# Altium PCB SD171-6.0PCB4.PcbDoc (part 4 of 11)
Units mil, origin at the board's own origin, x right, y up, seen from the top; angles counter-clockwise.
Board outline 5995 x 3921.26 mil, 6 copper layers (Top Layer, GND, Mid-Layer 1, Mid-Layer 2, VCC, Bottom Layer); 477 components, 539 nets, 2143 pads, 1050 vias.
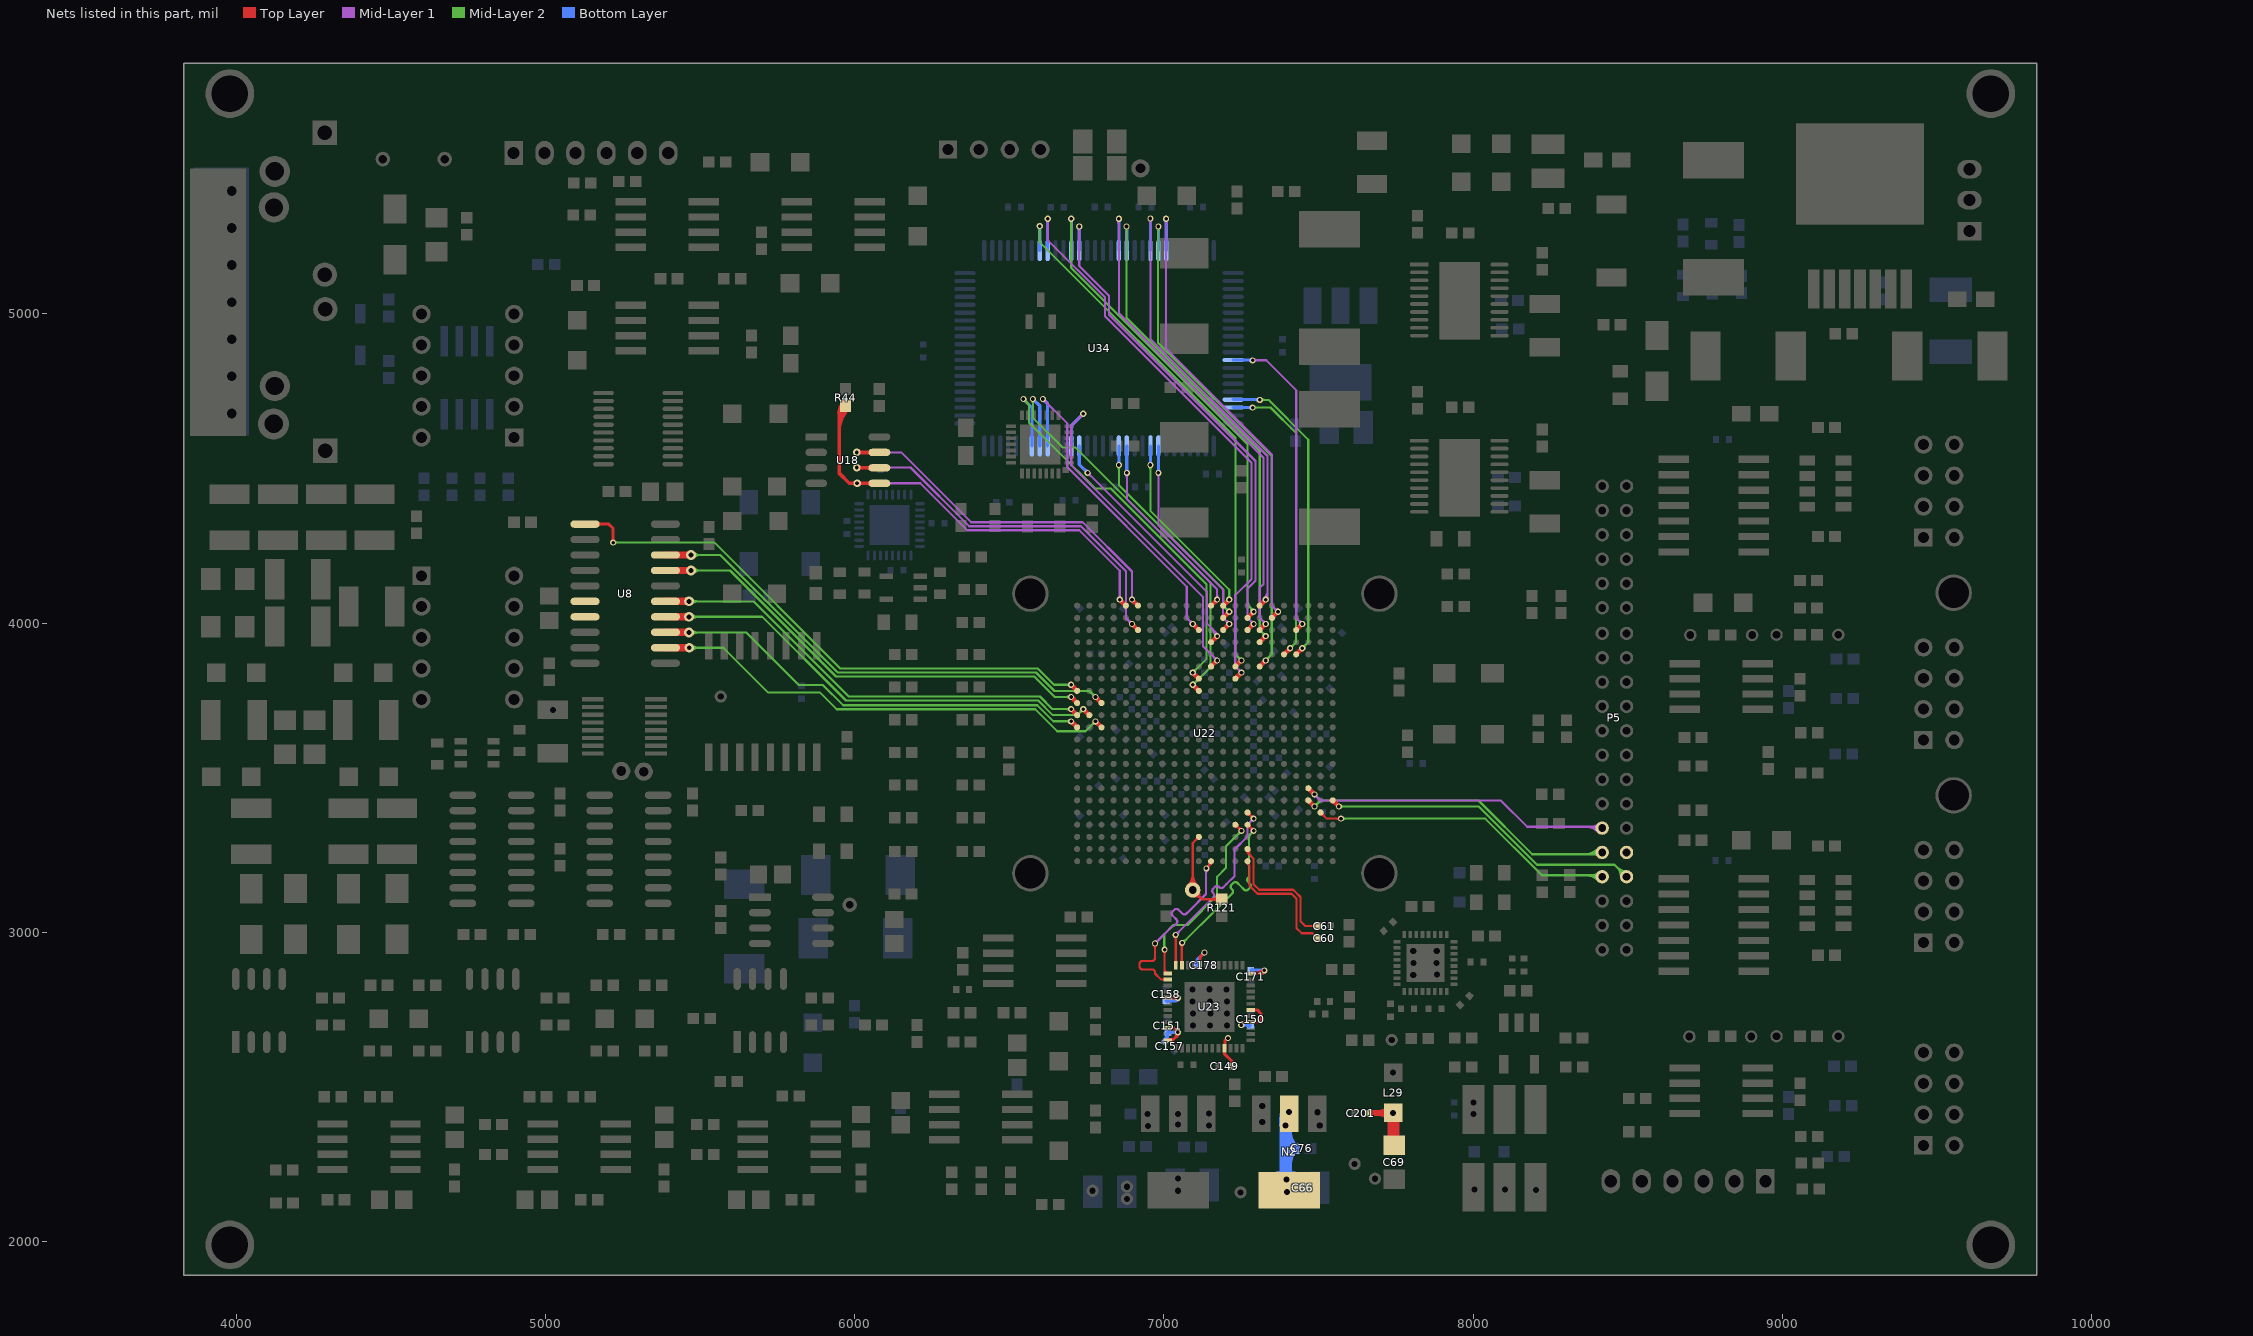
[diagram p8: the nets of this part, all layers, seen from the top]

## Via types
v1: diameter 19.68, hole 11.81, Top Layer to Bottom Layer, 521 vias
v2: diameter 50, hole 25, Top Layer to Bottom Layer, 162 vias
v3: diameter 30, hole 15, Top Layer to Bottom Layer, 100 vias
v4: diameter 39.37, hole 19.68, Top Layer to Bottom Layer, 74 vias
v5: diameter 31.5, hole 15.75, Top Layer to Bottom Layer, 44 vias
v6: diameter 40, hole 20, Top Layer to Bottom Layer, 38 vias
v7: diameter 24, hole 12, Top Layer to Bottom Layer, 33 vias
v8: diameter 47.24, hole 23.62, Top Layer to Bottom Layer, 24 vias
v9: diameter 59.06, hole 31.5, Top Layer to Bottom Layer, 10 vias
v10: diameter 60, hole 30, Top Layer to Bottom Layer, 9 vias
v11: diameter 25.98, hole 12.99, Top Layer to Bottom Layer, tented top, 9 vias
v12: diameter 23.62, hole 11.81, Top Layer to Bottom Layer, 8 vias
v13: diameter 20, hole 12, Top Layer to Bottom Layer, 6 vias
v14: diameter 50, hole 27.56, Top Layer to Bottom Layer, 4 vias
v15: diameter 51.18, hole 27.56, Top Layer to Bottom Layer, 2 vias
v16: diameter 39.37, hole 23.62, Top Layer to Bottom Layer, 2 vias
v17: diameter 80, hole 40, Top Layer to Bottom Layer, 1 vias
v18: diameter 47.24, hole 19.68, Top Layer to Bottom Layer, 1 vias
v19: diameter 47.24, hole 27.56, Top Layer to Bottom Layer, 1 vias
v20: diameter 22.05, hole 11.81, Top Layer to Bottom Layer, 1 vias

## Nets (pads, with @x,y where several pads share a name; then routed paths per layer and width w, separated by ;. In a path a pad name is that pad's centre, name@x,y a point inside that pad or via, vN(x,y) a via of type N, cw(c..) or ccw(c..) an arc to the next point about the centre after c; other vN are vias at no path point) (continued)
D10: U22.H19 U23.11 | length 738.1
  Top Layer w7: v1@7054.52,2960.52 cw(c7046.56,2952.56) 7057.81,2952.56 ; U23.11@7055.83,2902.43 ccw(c7051.05,2907.21) 7057.81,2907.21 ccw(c7064.57,2907.21) U23.11@7059.79,2902.43 ; U23.11@7057.81,2892.6 v1@7057.81,2962.81 ; 7057.81,2946.81 cw(c7077.19,2946.81) v1@7063.48,2960.52 ; U22.H19@7270.41,3341 cw(c7270.41,3325.68) 7281.24,3336.51 cw(c7292.06,3347.34) U22.H19@7276.75,3347.34 ; U22.H19@7270.41,3347.34 v1(7290.1,3327.65) ; v1@7283.75,3327.65 ccw(c7268.44,3327.65) 7279.27,3338.48 ccw(c7290.1,3349.31) v1@7290.1,3333.99
  Mid-Layer 2 w7: v1(7059,2965) 7061,2965 7174,3078 7220.59,3124.59 ccw(c7213.91,3131.27) 7220.59,3137.95 7218.64,3139.9 cw(c7225.32,3146.59) 7218.64,3153.27 7224.36,3159 cw(c7231.05,3152.31) 7237.73,3159 7246.36,3150.36 7259.02,3137.7 ccw(c7265.71,3144.38) 7272.39,3137.7 7278.12,3143.43 ccw(c7271.43,3150.11) 7278.12,3156.79 7272.14,3162.77 cw(c7278.82,3169.45) 7272.14,3176.14 7275,3179 7275,3262 7275,3312.56 v1(7290.1,3327.65) ; v1@7059,2971.34 ccw(c7059,2991.48) 7073.24,2977.24 ; v1@7065.34,2965 cw(c7075.83,2965) 7068.41,2972.41
D11: U22.H18 U23.12 | length 762.2
  Top Layer w7: v1@7033.52,2986.52 cw(c7022.42,2975.42) 7038.11,2975.42 ; U23.12@7036.13,2902.43 ccw(c7031.35,2907.21) 7038.11,2907.21 ccw(c7044.87,2907.21) U23.12@7040.09,2902.43 ; v1(7038,2991) 7037,2990 7037,2987 7038.11,2985.89 U23.12@7038.11,2892.6 ; 7038.11,2975.95 cw(c7053.05,2975.95) v1@7042.48,2986.52 ; U22.H18@7270.41,3380.37 cw(c7270.41,3365.05) 7281.24,3375.88 cw(c7292.06,3386.71) U22.H18@7276.75,3386.71 ; U22.H18@7270.41,3386.71 v1(7290.1,3367.02) ; v1@7283.75,3367.02 ccw(c7268.44,3367.02) 7279.27,3377.85 ccw(c7290.1,3388.68) v1@7290.1,3373.36
  Mid-Layer 1 w7: v1(7038,2991) 7142.08,3095.08 7156.9,3109.9 7159.76,3112.76 ccw(c7153.08,3119.45) 7159.76,3126.13 7159.01,3126.89 cw(c7165.69,3133.57) 7159.01,3140.25 7164.73,3145.98 cw(c7171.42,3139.3) 7178.1,3145.98 7178.86,3145.22 ccw(c7185.54,3151.9) 7192.22,3145.22 7201.5,3154.5 7228,3181 7228,3267.25 7270.75,3310 7270.75,3347.68 v1(7290.1,3367.02) ; v1@7038,2997.34 ccw(c7038,3012.65) 7048.83,3001.83 ccw(c7059.65,2991) v1@7044.34,2991 ; v1@7283.75,3367.02 cw(c7268.44,3367.02) 7279.27,3356.19 cw(c7290.1,3345.37) v1@7290.1,3360.68
D12: U22.J19 U23.13 | length 751.6
  Top Layer w7: v1@6997.52,2938.52 cw(c6986.69,2927.69) 7002,2927.69 cw(c7017.31,2927.69) v1@7006.48,2938.52 ; v1(7002,2943) 7002,2876.71 U23.13@7012.11,2866.6 ; U22.J19@7231.04,3341 cw(c7231.04,3325.68) 7241.87,3336.51 cw(c7252.69,3347.34) U22.J19@7237.38,3347.34 ; U22.J19@7231.04,3347.34 v1(7250.73,3327.65) ; v1@7244.38,3327.65 ccw(c7229.07,3327.65) 7239.9,3338.48 ccw(c7250.73,3349.31) v1@7250.73,3333.99
  Mid-Layer 2 w7: v1@6997.52,2947.48 ccw(c6989.1,2955.9) 7001,2955.9 ; 7001,2960.73 ccw(c7019.73,2960.73) v1@7006.48,2947.48 ; v1(7002,2943) 7002,2940 7001,2939 7001,2993 7031,3023 7076,3023 7172,3119 7172,3179 7201,3208 7201,3277.93 v1(7250.73,3327.65) ; v1@7244.38,3327.65 cw(c7229.07,3327.65) 7239.9,3316.82 cw(c7250.73,3306) v1@7250.73,3321.31
D13: U22.L22 U23.14 | length 744.8
  Top Layer w7: v1@6966.52,2958.52 cw(c6955.69,2947.69) 6971,2947.69 cw(c6986.31,2947.69) v1@6975.48,2958.52 ; v1(6971,2963) 6971,2929 6971,2915.85 cw(c6961.55,2915.85) 6961.55,2906.4 6930.45,2906.4 ccw(c6930.45,2896.95) 6921,2896.95 6921,2888.85 ccw(c6930.45,2888.85) 6930.45,2879.4 6961.55,2879.4 cw(c6961.55,2869.95) 6971,2869.95 6971,2865.9 6990,2846.9 U23.14@7012.11,2846.9 ; U23.14@7002.28,2844.92 ccw(c6997.5,2840.14) 6997.5,2846.9 ccw(c6997.5,2853.66) U23.14@7002.28,2848.88 ; v1(7137,3206) 7152.3,3221.3 U22.L22@7152.3,3229.23 ; v1@7140.96,3209.96 ccw(c7127.37,3223.56) U22.L22@7146.12,3227.82 ; 7149.93,3218.93 ccw(c7141.98,3226.88) U22.L22@7152.94,3229.37
  Mid-Layer 1 w7: v1(6971,2963) 7028,3020 7033,3020 7037.5,3024.5 7040.36,3027.36 ccw(c7033.68,3034.05) 7040.36,3040.73 7027.98,3053.11 cw(c7034.66,3059.79) 7027.98,3066.47 7033.71,3072.2 cw(c7040.39,3065.52) 7047.07,3072.2 7059.46,3059.82 ccw(c7066.14,3066.5) 7072.82,3059.82 7082.5,3069.5 7136,3123 7136,3206 v1(7137,3206) ; v1@6971,2969.34 ccw(c6971,2984.65) 6981.83,2973.83 ccw(c6992.65,2963) v1@6977.34,2963 ; v1@7132.52,3201.52 cw(c7124.1,3193.1) 7136,3193.1 ; 7136,3188.27 cw(c7154.73,3188.27) v1@7141.48,3201.52
DA0: U22.J6 U34.58 | length 1939.4
  Top Layer w15: U22.J6@7231.04,3859.15 v1(7250.73,3878.84)
  Mid-Layer 2 w7: v1(6598,5284) 6598,5232 7231.38,4598.62 7231.38,3898.18 v1(7250.73,3878.84) ; 6598,5268.69 cw(c6613.31,5268.69) 6602.48,5279.52 ccw(c6613.31,5268.69) 6598,5268.69 ; 6598,5268.69 ccw(c6582.69,5268.69) 6593.52,5279.52 cw(c6582.69,5268.69) 6598,5268.69 ; 7239.9,3889.66 cw(c7229.07,3878.84) v1@7244.38,3878.84 ; 7239.9,3889.66 ccw(c7250.73,3900.49) v1@7250.73,3885.18 ; 7239.9,3889.66 cw(c7229.07,3878.84) v1@7244.38,3878.84 ; 7239.9,3889.66 ccw(c7250.73,3900.49) v1@7250.73,3885.18 ; 7239.9,3889.66 ccw(c7250.73,3900.49) v1@7250.73,3885.18 ; 7239.9,3889.66 cw(c7229.07,3878.84) v1@7244.38,3878.84
  Bottom Layer w10: v1(6598,5284) 6598.07,5283.93 U34.58@6598.07,5204.94 ; v1@6594.58,5280.58 cw(c6586.14,5272.14) 6598.07,5272.14 ccw(c6586.14,5272.14) v1@6594.58,5280.58 ; 6598.07,5272.48 cw(c6609.52,5272.48) 6601.42,5280.58 ccw(c6609.52,5272.48) 6598.07,5272.48
DA1: U22.J7 U34.59 | length 2060.1
  Top Layer w15: U22.J7@7231.04,3819.78 v1(7250.73,3839.47)
  Mid-Layer 1 w7: v1(6624,5308) 6624,5238.88 6809,5053.88 6809,4993 7283,4519 7283,4142 7230.7,4089.7 7230.7,3870.13 7230,3869.43 7230,3860.19 v1(7250.73,3839.47) ; 6624,5292.69 cw(c6639.31,5292.69) 6628.48,5303.52 ccw(c6639.31,5292.69) 6624,5292.69 ; 6624,5292.69 ccw(c6608.69,5292.69) 6619.52,5303.52 cw(c6608.69,5292.69) 6624,5292.69 ; 7239.9,3850.29 cw(c7229.07,3839.47) v1@7244.38,3839.47 ; 7239.9,3850.29 ccw(c7250.73,3861.12) v1@7250.73,3845.81 ; 7239.9,3850.29 cw(c7229.07,3839.47) v1@7244.38,3839.47 ; 7239.9,3850.29 ccw(c7250.73,3861.12) v1@7250.73,3845.81 ; 7239.9,3850.29 ccw(c7250.73,3861.12) v1@7250.73,3845.81 ; 7239.9,3850.29 cw(c7229.07,3839.47) v1@7244.38,3839.47
  Bottom Layer w10: U34.59@6623.66,5204.94 6623.66,5307.66 v1(6624,5308) ; v1@6620.58,5304.58 cw(c6613.13,5297.13) 6623.66,5297.13 ccw(c6613.13,5297.13) v1@6620.58,5304.58 ; 6623.66,5295.49 cw(c6636.51,5295.49) 6627.42,5304.58 ccw(c6636.51,5295.49) 6623.66,5295.49
DA2: U22.H2 U34.62 | length 1801.7
  Top Layer w15: U22.H2@7270.41,4016.63 v1(7290.1,4036.32)
  Mid-Layer 2 w7: v1(6700,5308) 6700,5148.38 7270.75,4577.63 7270.75,4067.43 7271,4067.18 7271,4059 7290.1,4039.9 v1(7290.1,4036.32) ; 7281.38,4045.18 ccw(c7294.99,4048.82) v1@7289.86,4035.7 ; 6700,5292.69 cw(c6715.31,5292.69) 6704.48,5303.52 ccw(c6715.31,5292.69) 6700,5292.69 ; 6700,5292.69 ccw(c6684.69,5292.69) 6695.52,5303.52 cw(c6684.69,5292.69) 6700,5292.69 ; 7276.73,4053.27 cw(c7259.78,4036.32) v1@7283.75,4036.32 ; 7276.73,4053.27 cw(c7259.78,4036.32) v1@7283.75,4036.32 ; 7276.73,4053.27 cw(c7259.78,4036.32) v1@7283.75,4036.32
  Bottom Layer w10: v1(6700,5308) 6700.43,5307.57 U34.62@6700.43,5204.94 ; v1@6696.58,5304.58 cw(c6687.26,5295.26) 6700.43,5295.26 ccw(c6687.26,5295.26) v1@6696.58,5304.58 ; 6700.43,5297.35 cw(c6710.65,5297.35) 6703.42,5304.58 ccw(c6710.65,5297.35) 6700.43,5297.35
DA3: U22.H3 U34.63 | length 1803.5
  Top Layer w15: U22.H3@7270.41,3977.26 v1(7290.1,3996.95)
  Mid-Layer 1 w7: v1(6726,5283) 6726,5155.26 6822,5059.26 6822,4998.38 7296,4524.38 7296,4136.62 7270.75,4111.37 7270.75,4016.29 v1(7290.1,3996.95) ; 6726,5267.69 cw(c6741.31,5267.69) 6730.48,5278.52 ccw(c6741.31,5267.69) 6726,5267.69 ; 6726,5267.69 ccw(c6710.69,5267.69) 6721.52,5278.52 cw(c6710.69,5267.69) 6726,5267.69 ; 7279.27,4007.77 cw(c7268.44,3996.95) v1@7283.75,3996.95 ; 7279.27,4007.77 ccw(c7290.1,4018.6) v1@7290.1,4003.29 ; 7279.27,4007.77 cw(c7268.44,3996.95) v1@7283.75,3996.95 ; 7279.27,4007.77 ccw(c7290.1,4018.6) v1@7290.1,4003.29 ; 7279.27,4007.77 ccw(c7290.1,4018.6) v1@7290.1,4003.29 ; 7279.27,4007.77 cw(c7268.44,3996.95) v1@7283.75,3996.95
  Bottom Layer w10: U34.63@6726.02,5204.94 v1(6726,5283) ; v1@6722.58,5279.58 cw(c6714.25,5271.25) 6726.02,5271.25 ccw(c6714.25,5271.25) v1@6722.58,5279.58 ; 6726.02,5271.37 cw(c6737.63,5271.37) 6729.42,5279.58 ccw(c6737.63,5271.37) 6726.02,5271.37
DA4: U22.G3 U34.68 | length 1805.8
  Top Layer w15: U22.G3@7309.78,3977.26 v1(7329.47,3996.95)
  Mid-Layer 1 w7: v1(6854,5308) 6854,5003.15 7322,4535.15 7322,4125.85 7310,4113.85 7310,4016.41 v1(7329.47,3996.95) ; 6854,5292.69 cw(c6869.31,5292.69) 6858.48,5303.52 ccw(c6869.31,5292.69) 6854,5292.69 ; 6854,5292.69 ccw(c6838.69,5292.69) 6849.52,5303.52 cw(c6838.69,5292.69) 6854,5292.69 ; 7318.64,4007.77 cw(c7307.81,3996.95) v1@7323.12,3996.95 ; 7318.64,4007.77 ccw(c7329.47,4018.6) v1@7329.47,4003.29 ; 7318.64,4007.77 cw(c7307.81,3996.95) v1@7323.12,3996.95 ; 7318.64,4007.77 ccw(c7329.47,4018.6) v1@7329.47,4003.29 ; 7318.64,4007.77 ccw(c7329.47,4018.6) v1@7329.47,4003.29 ; 7318.64,4007.77 cw(c7307.81,3996.95) v1@7323.12,3996.95
  Bottom Layer w10: U34.68@6853.98,5204.94 v1(6854,5308) ; v1@6850.58,5304.58 cw(c6842.37,5296.37) 6853.98,5296.37 ccw(c6842.37,5296.37) v1@6850.58,5304.58 ; 6853.98,5296.25 cw(c6865.75,5296.25) 6857.42,5304.58 ccw(c6865.75,5296.25) 6853.98,5296.25
DA5: U22.G4 U34.69 | length 1775.1
  Top Layer w15: U22.G4@7309.78,3937.89 v1(7329.47,3957.58)
  Mid-Layer 2 w7: v1(6879,5283) 6879,4987.77 7310.12,4556.65 7310.12,3977.6 7329.47,3958.26 v1(7329.47,3957.58) ; 6879,5267.69 cw(c6894.31,5267.69) 6883.48,5278.52 ccw(c6894.31,5267.69) 6879,5267.69 ; 6879,5267.69 ccw(c6863.69,5267.69) 6874.52,5278.52 cw(c6863.69,5267.69) 6879,5267.69 ; 7318.15,3969.57 cw(c7306.16,3957.58) v1@7323.12,3957.58 ; 7318.15,3969.57 cw(c7306.16,3957.58) v1@7323.12,3957.58 ; 7318.15,3969.57 cw(c7306.16,3957.58) v1@7323.12,3957.58 ; 7319.81,3967.92 ccw(c7329.47,3977.58) v1@7329.47,3963.92 ; 7319.81,3967.92 ccw(c7329.47,3977.58) v1@7329.47,3963.92 ; 7319.81,3967.92 ccw(c7329.47,3977.58) v1@7329.47,3963.92
  Bottom Layer w10: v1(6879,5283) 6879.57,5282.43 U34.69@6879.57,5204.94 ; v1@6875.58,5279.58 cw(c6865.94,5269.94) 6879.57,5269.94 ccw(c6865.94,5269.94) v1@6875.58,5279.58 ; 6879.57,5272.68 cw(c6889.32,5272.68) 6882.42,5279.58 ccw(c6889.32,5272.68) 6879.57,5272.68
DA6: U22.G1 U34.72 | length 1744.1
  Top Layer w15: U22.G1@7309.78,4056 v1(7329.47,4075.69)
  Mid-Layer 1 w7: v1(6956,5309) 6956,4919.54 7335,4540.54 7335,4081.22 v1(7329.47,4075.69) ; 7332.07,4092.44 ccw(c7340.65,4087.48) v1@7333.83,4080.29 ; 6956,5293.69 cw(c6971.31,5293.69) 6960.48,5304.52 ccw(c6971.31,5293.69) 6956,5293.69 ; 6956,5293.69 ccw(c6940.69,5293.69) 6951.52,5304.52 cw(c6940.69,5293.69) 6956,5293.69 ; v1@7324.98,4080.17 ccw(c7300.79,4104.36) 7335,4104.36 ; v1@7324.98,4080.17 ccw(c7300.79,4104.36) 7335,4104.36 ; v1@7324.98,4080.17 ccw(c7300.79,4104.36) 7335,4104.36 ; v1@7329.93,4075.22 ccw(c7317.69,4087.46) 7335,4087.46 ; v1@7329.93,4075.22 ccw(c7317.69,4087.46) 7335,4087.46 ; v1@7329.93,4075.22 ccw(c7317.69,4087.46) 7335,4087.46
  Bottom Layer w10: v1(6956,5309) 6956.34,5308.66 U34.72@6956.34,5204.94 ; v1@6952.58,5305.58 cw(c6943.49,5296.49) 6956.34,5296.49 ccw(c6943.49,5296.49) v1@6952.58,5305.58 ; 6956.34,5298.13 cw(c6966.87,5298.13) 6959.42,5305.58 ccw(c6966.87,5298.13) 6956.34,5298.13
DA7: U22.G6 U34.73 | length 1825.4
  Top Layer w15: U22.G6@7309.78,3859.15 v1(7329.47,3878.84)
  Mid-Layer 2 w7: v1@6981,5281 6981,4907 7348.81,4539.19 7348.81,3898.86 7329.47,3879.52 v1(7329.47,3878.84) ; v1@7329.47,3885.18 ccw(c7329.47,3898.84) 7339.12,3889.18 ; v1@7329.47,3885.18 ccw(c7329.47,3898.84) 7339.12,3889.18 ; v1@7329.47,3885.18 ccw(c7329.47,3898.84) 7339.12,3889.18 ; v1@7335.81,3878.84 cw(c7352.77,3878.84) 7340.78,3890.83 ; v1@7335.81,3878.84 cw(c7352.77,3878.84) 7340.78,3890.83 ; v1@7335.81,3878.84 cw(c7352.77,3878.84) 7340.78,3890.83 ; v1@6977.52,5278.52 cw(c6969.1,5270.1) 6981,5270.1 ccw(c6969.1,5270.1) v1@6977.52,5278.52 ; 6981,5265.27 cw(c6999.73,5265.27) 6986.48,5278.52 ccw(c6999.73,5265.27) 6981,5265.27
  Bottom Layer w10: U34.73@6981.93,5204.94 6981.93,5282.93 v1(6982,5283) ; v1@6978.58,5279.58 cw(c6970.48,5271.48) 6981.93,5271.48 ccw(c6970.48,5271.48) v1@6978.58,5279.58 ; 6981.93,5271.14 cw(c6993.86,5271.14) 6985.42,5279.58 ccw(c6993.86,5271.14) 6981.93,5271.14
DA8: U22.F2 U34.74 | length 1709.7
  Top Layer w15: U22.F2@7349.15,4016.63 v1(7368.84,4036.32)
  Mid-Layer 1 w7: v1(7007,5308) 7007,4886.92 7349.49,4544.43 7349.49,4055.66 v1(7368.84,4036.32) ; 7007,5292.69 cw(c7022.31,5292.69) 7011.48,5303.52 ccw(c7022.31,5292.69) 7007,5292.69 ; 7007,5292.69 ccw(c6991.69,5292.69) 7002.52,5303.52 cw(c6991.69,5292.69) 7007,5292.69 ; 7358.01,4047.14 cw(c7347.18,4036.32) v1@7362.49,4036.32 ; 7358.01,4047.14 ccw(c7368.84,4057.97) v1@7368.84,4042.66 ; 7358.01,4047.14 cw(c7347.18,4036.32) v1@7362.49,4036.32 ; 7358.01,4047.14 ccw(c7368.84,4057.97) v1@7368.84,4042.66 ; 7358.01,4047.14 ccw(c7368.84,4057.97) v1@7368.84,4042.66 ; 7358.01,4047.14 cw(c7347.18,4036.32) v1@7362.49,4036.32
  Bottom Layer w10: v1(7007,5308) 7007.52,5307.48 U34.74@7007.52,5204.94 ; v1@7003.58,5304.58 cw(c6994.05,5295.05) 7007.52,5295.05 ccw(c6994.05,5295.05) v1@7003.58,5304.58 ; 7007.52,5297.56 cw(c7017.44,5297.56) 7010.42,5304.58 ccw(c7017.44,5297.56) 7007.52,5297.56
DADIN: U8.17
DASCLK: U8.16
DB0: U22.K3 U34.8 | length 898.4
  Top Layer w15: U22.K3@7191.67,3977.26 v1(7211.36,3996.95)
  Mid-Layer 1 w7: v1(6982,4486) 6982,4317 7191.33,4107.67 7191.33,4016.97 v1(7211.36,3996.95) ; v1@6977.52,4481.52 cw(c6966.69,4470.69) 6982,4470.69 ; v1@6977.52,4481.52 cw(c6966.69,4470.69) 6982,4470.69 ; v1@6977.52,4481.52 cw(c6966.69,4470.69) 6982,4470.69 ; 6982,4470.69 cw(c6997.31,4470.69) v1@6986.48,4481.52 ; 6982,4470.69 cw(c6997.31,4470.69) v1@6986.48,4481.52 ; 6982,4470.69 cw(c6997.31,4470.69) v1@6986.48,4481.52 ; 7200.53,4007.77 cw(c7189.7,3996.95) v1@7205.01,3996.95 ; 7200.53,4007.77 ccw(c7211.36,4018.6) v1@7211.36,4003.29 ; 7200.53,4007.77 cw(c7189.7,3996.95) v1@7205.01,3996.95 ; 7200.53,4007.77 ccw(c7211.36,4018.6) v1@7211.36,4003.29 ; 7200.53,4007.77 ccw(c7211.36,4018.6) v1@7211.36,4003.29 ; 7200.53,4007.77 cw(c7189.7,3996.95) v1@7205.01,3996.95
  Bottom Layer w10: U34.8@6981.93,4573.06 6981.93,4486.07 v1(6982,4486) ; v1@6978.58,4489.42 ccw(c6970.48,4497.52) 6981.93,4497.52 ; v1@6978.58,4489.42 ccw(c6970.48,4497.52) 6981.93,4497.52 ; v1@6978.58,4489.42 ccw(c6970.48,4497.52) 6981.93,4497.52 ; 6981.93,4497.86 ccw(c6993.86,4497.86) v1@6985.42,4489.42 ; 6981.93,4497.86 ccw(c6993.86,4497.86) v1@6985.42,4489.42 ; 6981.93,4497.86 ccw(c6993.86,4497.86) v1@6985.42,4489.42
DB1: U22.K1 U34.9 | length 830
  Top Layer w15: U22.K1@7191.67,4056 v1(7211.36,4075.69)
  Mid-Layer 2 w7: v1(6956,4511) 6956,4363 7211,4108 v1@7211,4076.04 ; v1@6951.52,4506.52 cw(c6940.69,4495.69) 6956,4495.69 ; v1@6951.52,4506.52 cw(c6940.69,4495.69) 6956,4495.69 ; v1@6951.52,4506.52 cw(c6940.69,4495.69) 6956,4495.69 ; 6956,4495.69 cw(c6971.31,4495.69) v1@6960.48,4506.52 ; 6956,4495.69 cw(c6971.31,4495.69) v1@6960.48,4506.52 ; 6956,4495.69 cw(c6971.31,4495.69) v1@6960.48,4506.52 ; v1@7206.87,4080.17 ccw(c7196.9,4090.14) 7211,4090.14 ; v1@7206.87,4080.17 ccw(c7196.9,4090.14) 7211,4090.14 ; v1@7206.87,4080.17 ccw(c7196.9,4090.14) 7211,4090.14 ; 7211,4091.86 ccw(c7227.53,4091.86) v1@7215.84,4080.17 ; 7211,4091.86 ccw(c7227.53,4091.86) v1@7215.84,4080.17 ; 7211,4091.86 ccw(c7227.53,4091.86) v1@7215.84,4080.17
  Bottom Layer w10: v1(6956,4511) 6956.34,4511.34 U34.9@6956.34,4573.06 ; v1@6952.58,4514.42 ccw(c6943.49,4523.51) 6956.34,4523.51 ; v1@6952.58,4514.42 ccw(c6943.49,4523.51) 6956.34,4523.51 ; v1@6952.58,4514.42 ccw(c6943.49,4523.51) 6956.34,4523.51 ; 6956.34,4521.87 ccw(c6966.87,4521.87) v1@6959.42,4514.42 ; 6956.34,4521.87 ccw(c6966.87,4521.87) v1@6959.42,4514.42 ; 6956.34,4521.87 ccw(c6966.87,4521.87) v1@6959.42,4514.42
DB2: U22.L1 U34.12 | length 845.7
  Top Layer w15: U22.L1@7152.3,4056 v1(7171.99,4075.69)
  Mid-Layer 1 w7: v1(6880,4486) 6880,4400.62 7171.99,4108.63 v1(7171.99,4075.69) ; v1@6875.52,4481.52 cw(c6864.69,4470.69) 6880,4470.69 ; v1@6875.52,4481.52 cw(c6864.69,4470.69) 6880,4470.69 ; v1@6875.52,4481.52 cw(c6864.69,4470.69) 6880,4470.69 ; 6880,4470.69 cw(c6895.31,4470.69) v1@6884.48,4481.52 ; 6880,4470.69 cw(c6895.31,4470.69) v1@6884.48,4481.52 ; 6880,4470.69 cw(c6895.31,4470.69) v1@6884.48,4481.52 ; v1@7167.5,4080.17 ccw(c7156.67,4091) 7171.99,4091 ; v1@7167.5,4080.17 ccw(c7156.67,4091) 7171.99,4091 ; v1@7167.5,4080.17 ccw(c7156.67,4091) 7171.99,4091 ; 7171.99,4091 ccw(c7187.3,4091) v1@7176.47,4080.17 ; 7171.99,4091 ccw(c7187.3,4091) v1@7176.47,4080.17 ; 7171.99,4091 ccw(c7187.3,4091) v1@7176.47,4080.17
  Bottom Layer w10: U34.12@6879.57,4573.06 6879.57,4486.43 v1(6880,4486) ; v1@6876.58,4489.42 ccw(c6869.35,4496.65) 6879.57,4496.65 ; v1@6876.58,4489.42 ccw(c6869.35,4496.65) 6879.57,4496.65 ; v1@6876.58,4489.42 ccw(c6869.35,4496.65) 6879.57,4496.65 ; 6879.57,4498.74 ccw(c6892.74,4498.74) v1@6883.42,4489.42 ; 6879.57,4498.74 ccw(c6892.74,4498.74) v1@6883.42,4489.42 ; 6879.57,4498.74 ccw(c6892.74,4498.74) v1@6883.42,4489.42
DB3: U22.K2 U34.13 | length 912
  Top Layer w15: U22.K2@7191.67,4016.63 v1(7211.36,4036.32)
  Mid-Layer 2 w7: v1(6854,4511) 6854,4446.62 7192,4108.62 7192,4055.67 v1(7211.36,4036.32) ; v1@6849.52,4506.52 cw(c6838.69,4495.69) 6854,4495.69 ; v1@6849.52,4506.52 cw(c6838.69,4495.69) 6854,4495.69 ; v1@6849.52,4506.52 cw(c6838.69,4495.69) 6854,4495.69 ; 6854,4495.69 cw(c6869.31,4495.69) v1@6858.48,4506.52 ; 6854,4495.69 cw(c6869.31,4495.69) v1@6858.48,4506.52 ; 6854,4495.69 cw(c6869.31,4495.69) v1@6858.48,4506.52 ; 7200.53,4047.14 cw(c7189.7,4036.32) v1@7205.01,4036.32 ; 7200.53,4047.14 ccw(c7211.36,4057.97) v1@7211.36,4042.66 ; 7200.53,4047.14 cw(c7189.7,4036.32) v1@7205.01,4036.32 ; 7200.53,4047.14 ccw(c7211.36,4057.97) v1@7211.36,4042.66 ; 7200.53,4047.14 ccw(c7211.36,4057.97) v1@7211.36,4042.66 ; 7200.53,4047.14 cw(c7189.7,4036.32) v1@7205.01,4036.32
  Bottom Layer w10: v1(6854,4511) U34.13@6853.98,4573.06 ; v1@6850.58,4514.42 ccw(c6842.37,4522.63) 6853.98,4522.63 ; v1@6850.58,4514.42 ccw(c6842.37,4522.63) 6853.98,4522.63 ; v1@6850.58,4514.42 ccw(c6842.37,4522.63) 6853.98,4522.63 ; 6853.98,4522.75 ccw(c6865.75,4522.75) v1@6857.42,4514.42 ; 6853.98,4522.75 ccw(c6865.75,4522.75) v1@6857.42,4514.42 ; 6853.98,4522.75 ccw(c6865.75,4522.75) v1@6857.42,4514.42
DB4: U22.L4 U34.18 | length 1087.2
  Top Layer w15: U22.L4@7152.3,3937.89 v1(7171.99,3957.58)
  Mid-Layer 1 w7: v1(6753,4486) 7139.64,4099.36 7139.64,3997.36 7171.99,3965.01 v1(7171.99,3957.58) ; 7162.72,3968.48 ccw(c7180.76,3973.31) v1@7171.67,3957 ; v1@6753,4479.66 cw(c6753,4464.35) 6763.83,4475.17 ; v1@6753,4479.66 cw(c6753,4464.35) 6763.83,4475.17 ; v1@6753,4479.66 cw(c6753,4464.35) 6763.83,4475.17 ; v1@6759.34,4486 ccw(c6774.65,4486) 6763.83,4475.17 ; v1@6759.34,4486 ccw(c6774.65,4486) 6763.83,4475.17 ; v1@6759.34,4486 ccw(c6774.65,4486) 6763.83,4475.17 ; 7155.9,3981.1 cw(c7132.37,3957.58) v1@7165.64,3957.58 ; 7155.9,3981.1 cw(c7132.37,3957.58) v1@7165.64,3957.58 ; 7155.9,3981.1 cw(c7132.37,3957.58) v1@7165.64,3957.58 ; 7167.85,3969.15 cw(c7156.27,3957.58) v1@7172.64,3957.58 ; 7167.85,3969.15 cw(c7156.27,3957.58) v1@7172.64,3957.58 ; 7167.85,3969.15 cw(c7156.27,3957.58) v1@7172.64,3957.58
  Bottom Layer w10: U34.18@6726.02,4573.06 6726.02,4512.98 v1(6753,4486) ; 6744.73,4494.27 cw(c6736.47,4486) v1@6748.16,4486 ; 6744.73,4494.27 ccw(c6753,4502.53) v1@6753,4490.84 ; 6744.73,4494.27 cw(c6736.47,4486) v1@6748.16,4486 ; 6744.73,4494.27 ccw(c6753,4502.53) v1@6753,4490.84 ; 6744.73,4494.27 ccw(c6753,4502.53) v1@6753,4490.84 ; 6744.73,4494.27 cw(c6736.47,4486) v1@6748.16,4486
DB5: U22.L6 U34.19 | length 1357
  Top Layer w15: U22.L6@7152.3,3859.15 v1(7171.99,3878.84)
  Mid-Layer 1 w7: v1(6739,4677) 6700,4638 6700,4510 7126.64,4083.36 7126.64,3924.18 v1(7171.99,3878.84) ; 6728.17,4666.17 cw(c6739,4655.35) v1@6739,4670.66 ; 6728.17,4666.17 ccw(c6717.35,4677) v1@6732.66,4677 ; 6728.17,4666.17 cw(c6739,4655.35) v1@6739,4670.66 ; 6728.17,4666.17 ccw(c6717.35,4677) v1@6732.66,4677 ; 6728.17,4666.17 ccw(c6717.35,4677) v1@6732.66,4677 ; 6728.17,4666.17 cw(c6739,4655.35) v1@6739,4670.66 ; 7161.16,3889.66 cw(c7150.33,3878.84) v1@7165.64,3878.84 ; 7161.16,3889.66 ccw(c7171.99,3900.49) v1@7171.99,3885.18 ; 7161.16,3889.66 cw(c7150.33,3878.84) v1@7165.64,3878.84 ; 7161.16,3889.66 ccw(c7171.99,3900.49) v1@7171.99,3885.18 ; 7161.16,3889.66 ccw(c7171.99,3900.49) v1@7171.99,3885.18 ; 7161.16,3889.66 cw(c7150.33,3878.84) v1@7165.64,3878.84
  Bottom Layer w10: U34.19@6700.43,4573.06 6700.43,4638.43 v1(6739,4677) ; 6730.73,4668.73 cw(c6739,4660.47) v1@6739,4672.16 ; 6730.73,4668.73 ccw(c6722.47,4677) v1@6734.16,4677 ; 6730.73,4668.73 cw(c6739,4660.47) v1@6739,4672.16 ; 6730.73,4668.73 ccw(c6722.47,4677) v1@6734.16,4677 ; 6730.73,4668.73 ccw(c6722.47,4677) v1@6734.16,4677 ; 6730.73,4668.73 cw(c6739,4660.47) v1@6739,4672.16
DB6: U22.M3 U34.22 | length 1296.5
  Top Layer w15: v1(7093.24,3996.95) U22.M3@7112.93,3977.26
  Mid-Layer 1 w7: v1(6608,4725) 6687,4646 6687,4504.62 7073.9,4117.71 7073.9,4021.9 ; 7074,4022 7073.9,4021.9 ; v1(7093.24,3996.95) 7073.9,4016.29 7073.9,4021.9 ; v1@6608,4718.66 cw(c6608,4703.35) 6618.83,4714.17 ; v1@6608,4718.66 cw(c6608,4703.35) 6618.83,4714.17 ; v1@6608,4718.66 cw(c6608,4703.35) 6618.83,4714.17 ; v1@6614.34,4725 ccw(c6629.65,4725) 6618.83,4714.17 ; v1@6614.34,4725 ccw(c6629.65,4725) 6618.83,4714.17 ; v1@6614.34,4725 ccw(c6629.65,4725) 6618.83,4714.17 ; 7082.42,4007.77 cw(c7071.59,3996.95) v1@7086.9,3996.95 ; 7082.42,4007.77 ccw(c7093.24,4018.6) v1@7093.24,4003.29 ; 7082.42,4007.77 cw(c7071.59,3996.95) v1@7086.9,3996.95 ; 7082.42,4007.77 ccw(c7093.24,4018.6) v1@7093.24,4003.29 ; 7082.42,4007.77 ccw(c7093.24,4018.6) v1@7093.24,4003.29 ; 7082.42,4007.77 cw(c7071.59,3996.95) v1@7086.9,3996.95
  Bottom Layer w10: v1(6608,4725) 6623.66,4709.34 U34.22@6623.66,4573.06 ; 6616.27,4716.73 cw(c6624.53,4725) 6612.84,4725 ccw(c6624.53,4725) 6616.27,4716.73 ; 6616.27,4716.73 ccw(c6608,4708.47) 6608,4720.16 cw(c6608,4708.47) 6616.27,4716.73
DB7: U22.M8 U34.23 | length 1599.5
  Top Layer w15: v1(7093.24,3800.1) U22.M8@7112.93,3780.41
  Mid-Layer 2 w7: v1(6576,4725) 6576,4664 6671.77,4568.23 6713,4568.23 7151,4130.23 7151,3857.85 v1(7093.24,3800.1) ; v1@6571.52,4720.52 cw(c6560.69,4709.69) 6576,4709.69 ; v1@6571.52,4720.52 cw(c6560.69,4709.69) 6576,4709.69 ; v1@6571.52,4720.52 cw(c6560.69,4709.69) 6576,4709.69 ; 6576,4709.69 cw(c6591.31,4709.69) v1@6580.48,4720.52 ; 6576,4709.69 cw(c6591.31,4709.69) v1@6580.48,4720.52 ; 6576,4709.69 cw(c6591.31,4709.69) v1@6580.48,4720.52 ; v1@7093.24,3806.44 ccw(c7093.24,3821.75) 7104.07,3810.92 ; v1@7093.24,3806.44 ccw(c7093.24,3821.75) 7104.07,3810.92 ; v1@7093.24,3806.44 ccw(c7093.24,3821.75) 7104.07,3810.92 ; v1@7099.59,3800.1 cw(c7114.9,3800.1) 7104.07,3810.92 ; v1@7099.59,3800.1 cw(c7114.9,3800.1) 7104.07,3810.92 ; v1@7099.59,3800.1 cw(c7114.9,3800.1) 7104.07,3810.92
  Bottom Layer w10: v1(6576,4725) 6598.07,4702.93 U34.23@6598.07,4573.06 ; v1@6576,4720.16 cw(c6576,4708.47) 6584.27,4716.73 ; v1@6576,4720.16 cw(c6576,4708.47) 6584.27,4716.73 ; v1@6576,4720.16 cw(c6576,4708.47) 6584.27,4716.73 ; v1@6580.84,4725 ccw(c6592.53,4725) 6584.27,4716.73 ; v1@6580.84,4725 ccw(c6592.53,4725) 6584.27,4716.73 ; v1@6580.84,4725 ccw(c6592.53,4725) 6584.27,4716.73
DB8: U22.M7 U34.24 | length 1570.3
  Top Layer w15: v1(7093.24,3839.47) U22.M7@7112.93,3819.78
  Mid-Layer 2 w7: v1(6545,4725) 6563,4707 6563,4648.62 6656.38,4555.23 6776.65,4435 6827.85,4435 7138,4124.85 7138,3884.22 v1(7093.24,3839.47) ; v1@6545,4718.66 cw(c6545,4703.35) 6555.83,4714.17 ; v1@6545,4718.66 cw(c6545,4703.35) 6555.83,4714.17 ; v1@6545,4718.66 cw(c6545,4703.35) 6555.83,4714.17 ; v1@6551.34,4725 ccw(c6566.65,4725) 6555.83,4714.17 ; v1@6551.34,4725 ccw(c6566.65,4725) 6555.83,4714.17 ; v1@6551.34,4725 ccw(c6566.65,4725) 6555.83,4714.17 ; v1@7093.24,3845.81 ccw(c7093.24,3861.12) 7104.07,3850.29 ; v1@7093.24,3845.81 ccw(c7093.24,3861.12) 7104.07,3850.29 ; v1@7093.24,3845.81 ccw(c7093.24,3861.12) 7104.07,3850.29 ; v1@7099.59,3839.47 cw(c7114.9,3839.47) 7104.07,3850.29 ; v1@7099.59,3839.47 cw(c7114.9,3839.47) 7104.07,3850.29 ; v1@7099.59,3839.47 cw(c7114.9,3839.47) 7104.07,3850.29
  Bottom Layer w10: v1(6545,4725) 6572.48,4697.52 U34.24@6572.48,4573.06 ; v1@6545,4720.16 cw(c6545,4708.47) 6553.27,4716.73 ; v1@6545,4720.16 cw(c6545,4708.47) 6553.27,4716.73 ; v1@6545,4720.16 cw(c6545,4708.47) 6553.27,4716.73 ; v1@6549.84,4725 ccw(c6561.53,4725) 6553.27,4716.73 ; v1@6549.84,4725 ccw(c6561.53,4725) 6553.27,4716.73 ; v1@6549.84,4725 ccw(c6561.53,4725) 6553.27,4716.73
DCO: pad.0@7092.8,3136.1 R121.1 U22.M20 | length 629.6
  Top Layer w7: pad.0@7077.6,3151.3 ccw(c7040.66,3188.24) 7092.9,3188.24 ; pad.0@7082.55,3146.35 ccw(c7057.56,3171.34) 7092.9,3171.34 ; 7092.9,3170.87 ccw(c7127.57,3170.87) pad.0@7103.06,3146.35 ; 7092.9,3187.77 ccw(c7144.47,3187.77) pad.0@7108.01,3151.3 ; pad.0@7094.97,3121.76 cw(c7098.16,3100.66) 7113.25,3115.75 ; pad.0@7096.02,3114.84 cw(c7100.74,3083.64) 7123.05,3105.95 cw(c7145.5,3128.41) pad.0@7114.08,3132.99 ; U22.M20@7106.59,3307.97 cw(c7091.28,3307.97) 7102.1,3297.14 cw(c7112.93,3286.31) U22.M20@7112.93,3301.63 ; pad.0@7107.15,3134 ccw(c7128.29,3130.92) 7113.18,3115.81 ; U22.M20@7112.93,3307.97 7092.9,3287.94 7092.9,3136.1 7123,3106 R121.1@7187,3106 ; R121.1@7176.75,3095.75 ccw(c7151.99,3070.99) 7151.99,3106 ccw(c7151.99,3141.01) R121.1@7176.75,3116.25 ; R121.1@7181.7,3100.7 ccw(c7168.89,3087.89) 7168.89,3106 ccw(c7168.89,3124.11) R121.1@7181.7,3111.3
DUTAVDD: C66.1 C76.1 C149.2 C150.2 C151.2 C157.2 N2.2 N2.4 pad.0@7393.88,2374 pad.0@7396.88,2200 pad.0@7398,2159 pad.0@7404,2418 U23.22 U23.24 U23.33 U23.40 U23.42 | length 1035.8
  Top Layer w10: U23.24@7012.11,2650 7014.51,2652.4 7030.82,2652.4 ; U23.22@7012.11,2689.4 7031.6,2689.4 v1(7045,2676) 7045,2666.59 7030.82,2652.4 ; U23.24@7020.62,2651.12 ccw(c7024.89,2658.32) 7030.82,2652.4 ; U23.24@7020.88,2649.08 cw(c7028.89,2641.07) 7028.89,2652.4 ; 7035.52,2657.11 ccw(c7022.51,2670.12) v1@7040.31,2674.78 ; v1(7207,2657) 7205,2657 7196.84,2648.84 7196.84,2625.23 U23.33@7195.61,2624 7195.61,2606.39 7219.3,2582.7 C149.2@7219.3,2571.98 ; C149.2@7214.77,2570.52 ccw(c7203.82,2581.47) 7219.3,2581.47 ; v1(7250,2699) 7248,2701 7256.1,2709.1 U23.40@7280.71,2709.1 7306.1,2709.1 7315,2718 7315,2735 7301.5,2748.5 U23.42@7280.71,2748.5
  Bottom Layer w10: C157.2@7000.92,2649.82 ccw(c6975.53,2676) C151.2@7012,2676 ; C157.2@7003.69,2645.52 7012,2653.83 C151.2@7012,2676 ; C151.2@7008.46,2672.46 cw(c6999.93,2663.93) 7012,2663.93 cw(c7024.07,2663.93) C151.2@7015.54,2672.46 ; C151.2@7016.54,2672.46 cw(c7025.07,2663.93) 7025.07,2676 cw(c7025.07,2688.07) C151.2@7016.54,2679.54 ; v1@7041.58,2672.58 ccw(c7033.31,2664.31) 7033.31,2676 ccw(c7033.31,2687.69) v1@7041.58,2679.42 ; v1(7045,2676) C151.2@7012,2676 ; v1(7250,2699) 7278.32,2699 C150.2@7280.02,2697.3 ; v1@7253.42,2695.58 cw(c7261.69,2687.31) 7261.69,2699 cw(c7261.69,2710.69) v1@7253.42,2702.42 ; 7262.84,2699 cw(c7262.84,2681.13) C150.2@7275.48,2693.77
  Bottom Layer w39.37: C66.1@7393.88,2173 7393.88,2407.88 pad.0@7404,2418 ; 7393.88,2245.84 cw(c7472.16,2245.84) C76.1@7416.81,2301.19 ; 7393.88,2354.16 ccw(c7472.16,2354.16) C76.1@7416.81,2298.81 ; pad.0@7393.88,2374 cw(c7434.08,2387.92) pad.0@7404,2418 ; pad.0@7393.88,2393.57 cw(c7428.43,2393.57) pad.0@7404,2418
DUTDRVDD: C69.1 C158.1 C171.2 C178.2 C201.2 L29.1 pad.0@7741,2414 U23.8 U23.17 U23.48 | length 781.4
  Top Layer w10: U23.17@7012.11,2787.8 7012.91,2787 v1(7045,2787) ; v1@7041.58,2783.58 ccw(c7033.31,2775.31) 7033.31,2787 ccw(c7033.31,2798.69) v1@7041.58,2790.42 ; U23.8@7116.91,2892.6 7116.91,2919.91 v1(7131,2934) ; U23.48@7280.71,2866.6 7315.6,2866.6 v1(7325,2876) ; U23.48@7290.62,2866.6 ccw(c7290.62,2910.38) v1@7321.58,2879.42 ; 7314.76,2866.6 ccw(c7314.76,2886.24) v1@7328.65,2872.35
  Top Layer w19.68: C201.2@7658.3,2413.98 7741.16,2413.98 L29.1@7742.17,2414.99 ; 7691.07,2413.98 ccw(c7691.07,2466.09) L29.1@7727.92,2429.25 ; 7695.94,2413.98 cw(c7695.94,2368.76) L29.1@7727.92,2400.74 ; L29.1@7717.2,2413.98 ccw(c7717.2,2437.8) L29.1@7734.04,2420.96 ; L29.1@7717.28,2413.98 cw(c7717.28,2390.28) L29.1@7734.04,2407.04
  Top Layer w39.37: L29.1@7742.17,2414.99 7742.17,2312.95 C69.1@7745,2310.12
  Bottom Layer w10: C158.1@7006.98,2777.7 7036.7,2777.7 7045,2786 v1(7045,2787) ; C158.1@7010.85,2777.7 ccw(c7010.85,2821.15) v1@7041.58,2790.42 ; C158.1@7011.52,2774.16 cw(c7020.05,2765.63) 7020.05,2777.7 cw(c7020.05,2789.77) C158.1@7011.52,2781.23 ; 7035,2777.7 ccw(c7035,2797) v1@7048.65,2783.35 ; C178.2@7103.77,2897.52 ccw(c7095.23,2906.05) 7107.3,2906.05 ccw(c7119.37,2906.05) C178.2@7110.84,2897.52 ; C178.2@7107.3,2892.98 7107.3,2910.3 v1(7131,2934) ; v1@7126.16,2934 cw(c7114.47,2934) 7122.73,2925.73 cw(c7131,2917.47) v1@7131,2929.16 ; C171.2@7280.98,2876.7 7324.3,2876.7 v1(7325,2876) ; C171.2@7285.52,2873.16 cw(c7294.05,2864.63) 7294.05,2876.7 cw(c7294.05,2888.77) C171.2@7285.52,2880.23 ; 7311.62,2876.7 cw(c7311.62,2862.62) v1@7321.58,2872.58 ; 7315,2876.7 ccw(c7315,2886) v1@7321.58,2879.42
E1#: U22.E5 U34.98 | length 1169
  Top Layer w15: U22.E5@7388.52,3898.52 v1(7408.21,3918.21)
  Mid-Layer 2 w7: v1(7287,4697) 7344.62,4697 7427.55,4614.07 7427.55,3938.23 7408.21,3918.89 v1(7408.21,3918.21) ; v1@7291.48,4692.52 cw(c7302.31,4681.69) 7302.31,4697 ; v1@7291.48,4692.52 cw(c7302.31,4681.69) 7302.31,4697 ; v1@7291.48,4692.52 cw(c7302.31,4681.69) 7302.31,4697 ; v1@7291.48,4701.48 ccw(c7302.31,4712.31) 7302.31,4697 ; v1@7291.48,4701.48 ccw(c7302.31,4712.31) 7302.31,4697 ; v1@7291.48,4701.48 ccw(c7302.31,4712.31) 7302.31,4697 ; v1@7408.21,3924.55 ccw(c7408.21,3938.21) 7417.86,3928.55 ; v1@7408.21,3924.55 ccw(c7408.21,3938.21) 7417.86,3928.55 ; v1@7408.21,3924.55 ccw(c7408.21,3938.21) 7417.86,3928.55 ; v1@7414.55,3918.21 cw(c7431.51,3918.21) 7419.52,3930.2 ; v1@7414.55,3918.21 cw(c7431.51,3918.21) 7419.52,3930.2 ; v1@7414.55,3918.21 cw(c7431.51,3918.21) 7419.52,3930.2
  Bottom Layer w10: U34.98@7224.06,4697.07 7286.93,4697.07 v1(7287,4697) ; 7275.14,4697.07 cw(c7275.14,4685.14) v1@7283.58,4693.58 ; 7275.14,4697.07 cw(c7275.14,4685.14) v1@7283.58,4693.58 ; 7275.14,4697.07 cw(c7275.14,4685.14) v1@7283.58,4693.58 ; 7275.48,4697.07 ccw(c7275.48,4708.52) v1@7283.58,4700.42 ; 7275.48,4697.07 ccw(c7275.48,4708.52) v1@7283.58,4700.42 ; 7275.48,4697.07 ccw(c7275.48,4708.52) v1@7283.58,4700.42
E2: U22.D5 U34.97 | length 1206.7
  Top Layer w15: U22.D5@7427.89,3898.52 v1(7447.58,3918.21)
  Mid-Layer 2 w7: v1(7310,4722) 7338,4722 7466.92,4593.08 7466.92,3938.23 7447.58,3918.89 v1(7447.58,3918.21) ; v1@7314.48,4717.52 cw(c7325.31,4706.69) 7325.31,4722 ; v1@7314.48,4717.52 cw(c7325.31,4706.69) 7325.31,4722 ; v1@7314.48,4717.52 cw(c7325.31,4706.69) 7325.31,4722 ; v1@7314.48,4726.48 ccw(c7325.31,4737.31) 7325.31,4722 ; v1@7314.48,4726.48 ccw(c7325.31,4737.31) 7325.31,4722 ; v1@7314.48,4726.48 ccw(c7325.31,4737.31) 7325.31,4722 ; v1@7447.58,3924.55 ccw(c7447.58,3938.21) 7457.23,3928.55 ; v1@7447.58,3924.55 ccw(c7447.58,3938.21) 7457.23,3928.55 ; v1@7447.58,3924.55 ccw(c7447.58,3938.21) 7457.23,3928.55 ; v1@7453.92,3918.21 cw(c7470.88,3918.21) 7458.89,3930.2 ; v1@7453.92,3918.21 cw(c7470.88,3918.21) 7458.89,3930.2 ; v1@7453.92,3918.21 cw(c7470.88,3918.21) 7458.89,3930.2
  Bottom Layer w10: U34.97@7224.06,4722.66 7309.34,4722.66 v1(7310,4722) ; 7296.71,4722.66 cw(c7296.71,4708.71) v1@7306.58,4718.58 ; 7296.71,4722.66 cw(c7296.71,4708.71) v1@7306.58,4718.58 ; 7296.71,4722.66 cw(c7296.71,4708.71) v1@7306.58,4718.58 ; 7299.91,4722.66 ccw(c7299.91,4732.09) v1@7306.58,4725.42 ; 7299.91,4722.66 ccw(c7299.91,4732.09) v1@7306.58,4725.42 ; 7299.91,4722.66 ccw(c7299.91,4732.09) v1@7306.58,4725.42
E3#: U22.D3 U34.92 | length 1235.8
  Top Layer w15: U22.D3@7427.89,3977.26 v1(7447.58,3996.95)
  Mid-Layer 1 w7: v1(7287,4850) 7331,4850 7428.23,4752.77 7428.23,4016.29 v1(7447.58,3996.95) ; v1@7291.48,4845.52 cw(c7302.31,4834.69) 7302.31,4850 ; v1@7291.48,4845.52 cw(c7302.31,4834.69) 7302.31,4850 ; v1@7291.48,4845.52 cw(c7302.31,4834.69) 7302.31,4850 ; v1@7291.48,4854.48 ccw(c7302.31,4865.31) 7302.31,4850 ; v1@7291.48,4854.48 ccw(c7302.31,4865.31) 7302.31,4850 ; v1@7291.48,4854.48 ccw(c7302.31,4865.31) 7302.31,4850 ; 7436.75,4007.77 cw(c7425.92,3996.95) v1@7441.23,3996.95 ; 7436.75,4007.77 ccw(c7447.58,4018.6) v1@7447.58,4003.29 ; 7436.75,4007.77 cw(c7425.92,3996.95) v1@7441.23,3996.95 ; 7436.75,4007.77 ccw(c7447.58,4018.6) v1@7447.58,4003.29 ; 7436.75,4007.77 ccw(c7447.58,4018.6) v1@7447.58,4003.29 ; 7436.75,4007.77 cw(c7425.92,3996.95) v1@7441.23,3996.95
  Bottom Layer w10: U34.92@7224.06,4850.61 7286.39,4850.61 v1(7287,4850) ; 7273.83,4850.61 cw(c7273.83,4836.83) v1@7283.58,4846.58 ; 7273.83,4850.61 cw(c7273.83,4836.83) v1@7283.58,4846.58 ; 7273.83,4850.61 cw(c7273.83,4836.83) v1@7283.58,4846.58 ; 7276.79,4850.61 ccw(c7276.79,4860.21) v1@7283.58,4853.42 ; 7276.79,4850.61 ccw(c7276.79,4860.21) v1@7283.58,4853.42 ; 7276.79,4850.61 ccw(c7276.79,4860.21) v1@7283.58,4853.42
EPSCLK: U18.6 U22.U3 | length 1571.3
  Top Layer w12: v7(6006,4503) 6007,4502 U18.6@6079.25,4502 ; v7@6010.24,4498.76 cw(c6018.07,4490.93) 6018.07,4502 ; v7@6010.24,4498.76 cw(c6018.07,4490.93) 6018.07,4502 ; v7@6010.24,4498.76 cw(c6018.07,4490.93) 6018.07,4502 ; v7@6010.24,4507.24 ccw(c6022.9,4519.9) 6022.9,4502 ; v7@6010.24,4507.24 ccw(c6022.9,4519.9) 6022.9,4502 ; v7@6010.24,4507.24 ccw(c6022.9,4519.9) 6022.9,4502 ; 6041.6,4502 ccw(c6041.6,4516.03) 6051.52,4506.11 cw(c6041.6,4516.03) 6041.6,4502 ; 6041.6,4502 cw(c6041.6,4487.97) 6051.52,4497.89 ccw(c6041.6,4487.97) 6041.6,4502
  Top Layer w15: v1(6896.39,3996.95) U22.U3@6916.08,3977.26
  Mid-Layer 1 w7: v7(6006,4503) 6180,4503 6370,4313 6731.54,4313 6877.05,4167.49 6877.05,4016.29 v1(6896.39,3996.95) ; v7@6012.01,4496.99 cw(c6026.52,4482.48) 6026.52,4503 ; v7@6012.01,4496.99 cw(c6026.52,4482.48) 6026.52,4503 ; v7@6012.01,4496.99 cw(c6026.52,4482.48) 6026.52,4503 ; v7@6012.01,4509.01 ccw(c6026.52,4523.52) 6026.52,4503 ; v7@6012.01,4509.01 ccw(c6026.52,4523.52) 6026.52,4503 ; v7@6012.01,4509.01 ccw(c6026.52,4523.52) 6026.52,4503 ; 6885.56,4007.77 cw(c6874.74,3996.95) v1@6890.05,3996.95 ; 6885.56,4007.77 ccw(c6896.39,4018.6) v1@6896.39,4003.29 ; 6885.56,4007.77 cw(c6874.74,3996.95) v1@6890.05,3996.95 ; 6885.56,4007.77 ccw(c6896.39,4018.6) v1@6896.39,4003.29 ; 6885.56,4007.77 ccw(c6896.39,4018.6) v1@6896.39,4003.29 ; 6885.56,4007.77 cw(c6874.74,3996.95) v1@6890.05,3996.95
EPSDA: R44.1 U18.5 U22.V1 | length 2233.3
  Top Layer w12: 5948.5,4680.5 cw(c5969.05,4659.96) R44.1@5969.72,4689 ; R44.1@5969.51,4689.01 ccw(c5968.39,4661.61) 5949,4681 ; R44.1@5970,4702 5949,4681 ; U18.5@6079.25,4452 v7(6007,4452) 5982,4452 5949,4485 5949,4681 ; 5992.51,4452 cw(c5992.51,4437.51) v7@6002.76,4447.76 ; 5992.51,4452 ccw(c5992.51,4466.49) v7@6002.76,4456.24 ; 5992.51,4452 cw(c5992.51,4437.51) v7@6002.76,4447.76 ; 5992.51,4452 ccw(c5992.51,4466.49) v7@6002.76,4456.24 ; 5992.51,4452 ccw(c5992.51,4466.49) v7@6002.76,4456.24 ; 5992.51,4452 cw(c5992.51,4437.51) v7@6002.76,4447.76 ; v7@6011.24,4447.76 cw(c6021.49,4437.51) 6021.49,4452 ; v7@6011.24,4447.76 cw(c6021.49,4437.51) 6021.49,4452 ; v7@6011.24,4447.76 cw(c6021.49,4437.51) 6021.49,4452 ; v7@6011.24,4456.24 ccw(c6021.49,4466.49) 6021.49,4452 ; v7@6011.24,4456.24 ccw(c6021.49,4466.49) 6021.49,4452 ; v7@6011.24,4456.24 ccw(c6021.49,4466.49) 6021.49,4452 ; 6041.6,4452 ccw(c6041.6,4466.03) 6051.52,4456.11 cw(c6041.6,4466.03) 6041.6,4452 ; 6041.6,4452 cw(c6041.6,4437.97) 6051.52,4447.89 ccw(c6041.6,4437.97) 6041.6,4452 ; 5949,4621.33 cw(c6049.67,4621.33) 5978.49,4692.51 ccw(c6049.67,4621.33) 5949,4621.33 ; 5949,4650.3 cw(c6020.7,4650.3) 5970,4701 ccw(c6020.7,4650.3) 5949,4650.3 ; 5949,4679.27 cw(c5991.73,4679.27) 5961.51,4709.49 ccw(c5991.73,4679.27) 5949,4679.27 ; 5950.22,4682.22 ccw(c5931.44,4701) 5958,4701 cw(c5931.44,4701) 5950.22,4682.22
  Top Layer w15: v1(6857.02,4075.69) U22.V1@6876.71,4056
  Mid-Layer 1 w7: v7(6007,4452) 6212,4452 6364,4300 6726.15,4300 6857.02,4169.13 v1(6857.02,4075.69) ; v7@6013.01,4445.99 cw(c6027.52,4431.48) 6027.52,4452 ; v7@6013.01,4445.99 cw(c6027.52,4431.48) 6027.52,4452 ; v7@6013.01,4445.99 cw(c6027.52,4431.48) 6027.52,4452 ; v7@6013.01,4458.01 ccw(c6027.52,4472.52) 6027.52,4452 ; v7@6013.01,4458.01 ccw(c6027.52,4472.52) 6027.52,4452 ; v7@6013.01,4458.01 ccw(c6027.52,4472.52) 6027.52,4452 ; v1@6852.54,4080.17 ccw(c6841.71,4091) 6857.02,4091 ; v1@6852.54,4080.17 ccw(c6841.71,4091) 6857.02,4091 ; v1@6852.54,4080.17 ccw(c6841.71,4091) 6857.02,4091 ; 6857.02,4091 ccw(c6872.33,4091) v1@6861.51,4080.17 ; 6857.02,4091 ccw(c6872.33,4091) v1@6861.51,4080.17 ; 6857.02,4091 ccw(c6872.33,4091) v1@6861.51,4080.17
EPWP: U18.7 U22.U1 | length 1523.2
  Top Layer w12: v7(6006,4552) U18.7@6079.25,4552 ; v7@6010.24,4547.76 cw(c6020.49,4537.51) 6020.49,4552 ; v7@6010.24,4547.76 cw(c6020.49,4537.51) 6020.49,4552 ; v7@6010.24,4547.76 cw(c6020.49,4537.51) 6020.49,4552 ; v7@6010.24,4556.24 ccw(c6020.49,4566.49) 6020.49,4552 ; v7@6010.24,4556.24 ccw(c6020.49,4566.49) 6020.49,4552 ; v7@6010.24,4556.24 ccw(c6020.49,4566.49) 6020.49,4552 ; 6041.6,4552 ccw(c6041.6,4566.03) 6051.52,4556.11 cw(c6041.6,4566.03) 6041.6,4552 ; 6041.6,4552 cw(c6041.6,4537.97) 6051.52,4547.89 ccw(c6041.6,4537.97) 6041.6,4552
  Top Layer w15: v1(6896.39,4075.69) U22.U1@6916.08,4056
  Mid-Layer 1 w7: v7(6006,4552) 6150,4552 6376,4326 6736.92,4326 6896.39,4166.53 v1(6896.39,4075.69) ; v7@6012.01,4545.99 cw(c6026.52,4531.48) 6026.52,4552 ; v7@6012.01,4545.99 cw(c6026.52,4531.48) 6026.52,4552 ; v7@6012.01,4545.99 cw(c6026.52,4531.48) 6026.52,4552 ; v7@6012.01,4558.01 ccw(c6026.52,4572.52) 6026.52,4552 ; v7@6012.01,4558.01 ccw(c6026.52,4572.52) 6026.52,4552 ; v7@6012.01,4558.01 ccw(c6026.52,4572.52) 6026.52,4552 ; v1@6891.91,4080.17 ccw(c6881.08,4091) 6896.39,4091 ; v1@6891.91,4080.17 ccw(c6881.08,4091) 6896.39,4091 ; v1@6891.91,4080.17 ccw(c6881.08,4091) 6896.39,4091 ; 6896.39,4091 ccw(c6911.7,4091) v1@6900.88,4080.17 ; 6896.39,4091 ccw(c6911.7,4091) v1@6900.88,4080.17 ; 6896.39,4091 ccw(c6911.7,4091) v1@6900.88,4080.17
F#LDAC: U8.2 U22.Y11 | length 1732
  Top Layer w15: v1(6778.28,3681.99) U22.Y11@6797.97,3662.3
  Top Layer w23.62: U8.2@5386.92,3920 v5(5464,3920)
  Mid-Layer 2 w7: v5(5464,3920) 5574,3920 5718.5,3775.5 5886.5,3775.5 5941,3721 6583.62,3721 6654.97,3649.64 6745.94,3649.64 v1(6778.28,3681.99) ; v5@5472.66,3911.34 cw(c5493.57,3890.43) 5493.57,3920 ; v5@5472.66,3911.34 cw(c5493.57,3890.43) 5493.57,3920 ; v5@5472.66,3911.34 cw(c5493.57,3890.43) 5493.57,3920 ; v5@5472.66,3928.66 ccw(c5493.57,3949.57) 5493.57,3920 ; v5@5472.66,3928.66 ccw(c5493.57,3949.57) 5493.57,3920 ; v5@5472.66,3928.66 ccw(c5493.57,3949.57) 5493.57,3920 ; 6767.45,3671.16 cw(c6778.28,3660.33) 6778.28,3675.64 ccw(c6778.28,3660.33) 6767.45,3671.16 ; 6767.45,3671.16 ccw(c6756.63,3681.99) 6771.94,3681.99 cw(c6756.63,3681.99) 6767.45,3671.16
F#SYNC: U8.5 U22.AB10 | length 1672.3
  Top Layer w15: v1(6699.54,3721.36) U22.AB10@6719.23,3701.67
  Top Layer w23.62: U8.5@5386.92,4070 v5(5463,4070)
  Mid-Layer 2 w7: v5(5463,4070) 5672,4070 5980,3762 6599,3762 6639.64,3721.36 v1(6699.54,3721.36) ; v5@5471.66,4061.34 cw(c5492.57,4040.43) 5492.57,4070 ; v5@5471.66,4061.34 cw(c5492.57,4040.43) 5492.57,4070 ; v5@5471.66,4061.34 cw(c5492.57,4040.43) 5492.57,4070 ; v5@5471.66,4078.66 ccw(c5492.57,4099.57) 5492.57,4070 ; v5@5471.66,4078.66 ccw(c5492.57,4099.57) 5492.57,4070 ; v5@5471.66,4078.66 ccw(c5492.57,4099.57) 5492.57,4070 ; 6684.23,3721.36 cw(c6684.23,3706.04) 6695.06,3716.87 ccw(c6684.23,3706.04) 6684.23,3721.36 ; 6684.23,3721.36 ccw(c6684.23,3736.67) 6695.06,3725.84 cw(c6684.23,3736.67) 6684.23,3721.36
FACLK: U8.7 U22.AB9 | length 1697.4
  Top Layer w15: v1(6699.54,3760.73) U22.AB9@6719.23,3741.04
  Top Layer w23.62: U8.7@5386.92,4170 v5(5470,4170)
  Mid-Layer 2 w7: v5(5470,4170) 5596,4170 5939,3827 6580.46,3827 6646.74,3760.73 v1(6699.54,3760.73) ; v5@5478.66,4161.34 cw(c5499.57,4140.43) 5499.57,4170 ; v5@5478.66,4161.34 cw(c5499.57,4140.43) 5499.57,4170 ; v5@5478.66,4161.34 cw(c5499.57,4140.43) 5499.57,4170 ; v5@5478.66,4178.66 ccw(c5499.57,4199.57) 5499.57,4170 ; v5@5478.66,4178.66 ccw(c5499.57,4199.57) 5499.57,4170 ; v5@5478.66,4178.66 ccw(c5499.57,4199.57) 5499.57,4170 ; 6684.23,3760.73 cw(c6684.23,3745.41) 6695.06,3756.24 ccw(c6684.23,3745.41) 6684.23,3760.73 ; 6684.23,3760.73 ccw(c6684.23,3776.04) 6695.06,3765.21 cw(c6684.23,3776.04) 6684.23,3760.73
FADOUT: U8.11 U22.AB8 | length 1935.7
  Top Layer w10: U8.11@5127.08,4320 5204,4320 5218,4306 v1(5218,4260) ; U8.11@5167.33,4315.18 cw(c5178.95,4303.56) 5178.95,4320 cw(c5178.95,4336.44) U8.11@5167.33,4324.82 ; v1@5214.58,4263.42 ccw(c5206.31,4271.69) 5218,4271.69 ccw(c5229.69,4271.69) v1@5221.42,4263.42
  Top Layer w15: v1(6699.54,3800.1) U22.AB8@6719.23,3780.41
  Mid-Layer 2 w7: v1(5218,4260) 5219,4261 5421,4261 5545,4261 5953,3853 6591.23,3853 6644.13,3800.1 v1(6699.54,3800.1) ; v1@5222.48,4255.52 cw(c5235.73,4242.27) 5235.73,4261 ; v1@5222.48,4264.48 ccw(c5230.9,4272.9) 5230.9,4261 ; v1@6695.06,3795.61 ccw(c6684.23,3784.78) 6684.23,3800.1 ccw(c6684.23,3815.41) v1@6695.06,3804.58
FASCLK: U8.8 U22.Y9 | length 1796.9
  Top Layer w15: v1(6778.28,3760.73) U22.Y9@6797.97,3741.04
  Top Layer w23.62: U8.8@5386.92,4220 v5(5470,4220)
  Mid-Layer 2 w7: v5(5470,4220) 5564.38,4220 5944.38,3840 6585.85,3840 6645.78,3780.07 6707.55,3780.07 6707.62,3780 6730.83,3780 6730.9,3780.07 6758.94,3780.07 v1(6778.28,3760.73) ; v5@5478.66,4211.34 cw(c5499.57,4190.43) 5499.57,4220 ; v5@5478.66,4211.34 cw(c5499.57,4190.43) 5499.57,4220 ; v5@5478.66,4211.34 cw(c5499.57,4190.43) 5499.57,4220 ; v5@5478.66,4228.66 ccw(c5499.57,4249.57) 5499.57,4220 ; v5@5478.66,4228.66 ccw(c5499.57,4249.57) 5499.57,4220 ; v5@5478.66,4228.66 ccw(c5499.57,4249.57) 5499.57,4220 ; 6767.45,3771.55 cw(c6756.63,3760.73) 6771.94,3760.73 ccw(c6756.63,3760.73) 6767.45,3771.55 ; 6767.45,3771.55 ccw(c6778.28,3782.38) 6778.28,3767.07 cw(c6778.28,3782.38) 6767.45,3771.55
FCLK_N: C60.1 U22.H22 | length 454
  Top Layer w7: U22.H22@7270.41,3229.23 7270.41,3221.34 7276.75,3215 7276.75,3149.86 7302.62,3124 7412.62,3124 7415.62,3121 7416,3121 7429,3108 7429,3012.62 7445.62,2996 7481.01,2996 C60.1@7497.62,2979.39 ; 7484.82,2992.2 ccw(c7497.62,3005) C60.1@7497.62,2986.89 ; 7487.23,2989.78 cw(c7477.84,2980.39) C60.1@7491.12,2980.39
FCLK_P: C61.1 U22.H21 | length 532.3
  Top Layer w7: U22.H21@7269.77,3268.73 ccw(c7287.27,3265.03) 7274.62,3252.37 ; U22.H21@7270.41,3268.6 7270.41,3256.58 ; U22.H21@7276.61,3267.28 ccw(c7302.33,3261.84) 7283.74,3243.25 ; C61.1@7493,3015.01 ccw(c7481.91,3003.91) 7481.91,3019.61 ccw(c7481.91,3035.3) C61.1@7493,3024.2 ; C61.1@7497.2,3020 C61.1@7497.6,3019.61 7457.4,3019.61 7442,3035 7442,3113.38 7421.38,3134 7421,3134 7418,3137 7308,3137 7289.75,3155.25 7289.75,3237.24 7270.41,3256.58 ; 7270.41,3256.58 ccw(c7262.2,3256.58) 7266.83,3263.36 cw(c7262.2,3256.58) 7270.41,3256.58 ; 7270.41,3256.58 cw(c7278.62,3256.58) 7273.99,3263.36 ccw(c7278.62,3256.58) 7270.41,3256.58
FDADIN: U8.3 U22.AB11 | length 1649.2
  Top Layer w15: v1(6699.54,3681.99) U22.AB11@6719.23,3662.3
  Top Layer w23.62: U8.3@5386.92,3970 5464,3970 v5(5463,3969)
  Mid-Layer 2 w7: v5(5463,3969) 5649,3969 5819,3799 5897,3799 5962,3734 6590.23,3734 6642.24,3681.99 v1(6699.54,3681.99) ; v5@5471.66,3960.34 cw(c5492.57,3939.43) 5492.57,3969 ; v5@5471.66,3960.34 cw(c5492.57,3939.43) 5492.57,3969 ; v5@5471.66,3960.34 cw(c5492.57,3939.43) 5492.57,3969 ; v5@5471.66,3977.66 ccw(c5492.57,3998.57) 5492.57,3969 ; v5@5471.66,3977.66 ccw(c5492.57,3998.57) 5492.57,3969 ; v5@5471.66,3977.66 ccw(c5492.57,3998.57) 5492.57,3969 ; 6684.23,3681.99 cw(c6684.23,3666.67) 6695.06,3677.5 ccw(c6684.23,3666.67) 6684.23,3681.99 ; 6684.23,3681.99 ccw(c6684.23,3697.3) 6695.06,3686.47 cw(c6684.23,3697.3) 6684.23,3681.99
FDASCLK: U8.4 U22.AA10 | length 1707
  Top Layer w15: v1(6738.91,3721.36) U22.AA10@6758.6,3701.67
  Top Layer w23.62: U8.4@5386.92,4020 v5(5463,4020)
  Mid-Layer 2 w7: v5(5463,4020) 5700,4020 5971,3749 6593.62,3749 6640.62,3702 6719.56,3702 v1(6738.91,3721.36) ; v5@5471.66,4011.34 cw(c5492.57,3990.43) 5492.57,4020 ; v5@5471.66,4011.34 cw(c5492.57,3990.43) 5492.57,4020 ; v5@5471.66,4011.34 cw(c5492.57,3990.43) 5492.57,4020 ; v5@5471.66,4028.66 ccw(c5492.57,4049.57) 5492.57,4020 ; v5@5471.66,4028.66 ccw(c5492.57,4049.57) 5492.57,4020 ; v5@5471.66,4028.66 ccw(c5492.57,4049.57) 5492.57,4020 ; 6728.08,3710.53 cw(c6738.91,3699.7) 6738.91,3715.01 ccw(c6738.91,3699.7) 6728.08,3710.53 ; 6728.08,3710.53 ccw(c6717.26,3721.36) 6732.57,3721.36 cw(c6717.26,3721.36) 6728.08,3710.53
FIO1: P5.7 U22.B18 | length 1266.3
  Top Layer w7: U22.B18@7506.63,3386.71 7526.34,3367 v1(7573,3367) ; 7517.46,3375.88 ccw(c7506.63,3365.05) 7506.63,3380.37 cw(c7506.63,3365.05) 7517.46,3375.88 ; 7517.46,3375.88 cw(c7528.28,3386.71) 7512.97,3386.71 ccw(c7528.28,3386.71) 7517.46,3375.88 ; 7557.69,3367 cw(c7557.69,3351.69) 7568.52,3362.52 ccw(c7557.69,3351.69) 7557.69,3367 ; 7557.69,3367 ccw(c7557.69,3382.31) 7568.52,3371.48 cw(c7557.69,3382.31) 7557.69,3367
  Mid-Layer 2 w7: v1(7573,3367) 8039.85,3367 8222.92,3183.92 8413.01,3183.92 P5.7@8418,3178.94 ; 8362.14,3183.92 cw(c8362.14,3123.07) P5.7@8405.16,3166.1 ; 8379.04,3183.92 cw(c8379.04,3139.97) P5.7@8410.11,3171.05 ; 8386.21,3183.92 ccw(c8386.21,3210.73) P5.7@8405.16,3191.77 ; 8395.94,3183.92 cw(c8395.94,3156.87) P5.7@8415.06,3176 ; 7588.31,3367 cw(c7588.31,3382.31) 7577.48,3371.48 ccw(c7588.31,3382.31) 7588.31,3367 ; 7588.31,3367 ccw(c7588.31,3351.69) 7577.48,3362.52 cw(c7588.31,3351.69) 7588.31,3367
FIO2: P5.8 U22.A17 | length 1212.4
  Top Layer w15: U22.A17@7546,3426.08 v1(7565.69,3406.39)
  Mid-Layer 2 w7: v1(7565.69,3406.39) 8018.84,3406.39 8207.23,3218 8457.68,3218 P5.8@8496.74,3178.94 ; P5.8@8478.59,3178.94 ccw(c8434.76,3178.94) 8465.75,3209.93 ccw(c8496.74,3240.92) P5.8@8496.74,3197.09 ; P5.8@8485.59,3178.94 ccw(c8458.66,3178.94) 8477.7,3197.98 ccw(c8496.74,3217.02) P5.8@8496.74,3190.09 ; 7581,3406.39 cw(c7581,3421.7) 7570.17,3410.88 ccw(c7581,3421.7) 7581,3406.39 ; 7581,3406.39 ccw(c7581,3391.08) 7570.17,3401.91 cw(c7581,3391.08) 7581,3406.39
FIO3: P5.9 U22.C17 | length 1219.1
  Top Layer w15: U22.C17@7467.26,3426.08 v1(7486.95,3406.39)
  Mid-Layer 2 w7: v1(7486.95,3406.39) 7506.55,3426 8017.62,3426 8191.81,3251.81 8412.13,3251.81 P5.9@8418,3257.68 ; 8360,3251.81 ccw(c8360,3315.68) P5.9@8405.16,3270.51 ; 8376.9,3251.81 ccw(c8376.9,3298.78) P5.9@8410.11,3265.56 ; 8388.34,3251.81 cw(c8388.34,3228.02) P5.9@8405.16,3244.84 ; 8393.8,3251.81 ccw(c8393.8,3281.88) P5.9@8415.06,3260.61 ; 7497.77,3417.22 cw(c7486.95,3428.05) 7486.95,3412.73 ccw(c7486.95,3428.05) 7497.77,3417.22 ; 7497.77,3417.22 ccw(c7508.6,3406.39) 7493.29,3406.39 cw(c7508.6,3406.39) 7497.77,3417.22
FIO4: P5.10
FIO5: P5.11 U22.C16 | length 1154.6
  Top Layer w15: U22.C16@7467.26,3465.45 v1(7486.95,3445.76)
  Mid-Layer 1 w7: v1(7486.95,3445.76) 7506.71,3426 8090,3426 8175,3341 8413.42,3341 P5.11@8418,3336.42 ; 8363.11,3341 cw(c8363.11,3281.53) P5.11@8405.16,3323.58 ; 8380.01,3341 cw(c8380.01,3298.43) P5.11@8410.11,3328.53 ; 8385.24,3341 ccw(c8385.24,3369.18) P5.11@8405.16,3349.25 ; 7497.77,3434.93 cw(c7508.6,3445.76) 7493.29,3445.76 ccw(c7508.6,3445.76) 7497.77,3434.93 ; 7497.77,3434.93 ccw(c7486.95,3424.11) 7486.95,3439.42 cw(c7486.95,3424.11) 7497.77,3434.93